# Altium PCB PCB1.PcbDoc
Units mm, origin at the board's own origin, x right, y up, seen from the top; angles counter-clockwise.
Board outline 90 x 50 mm, 2 copper layers (Top Layer, Bottom Layer); 14 components, 36 nets, 99 pads, 3 vias.
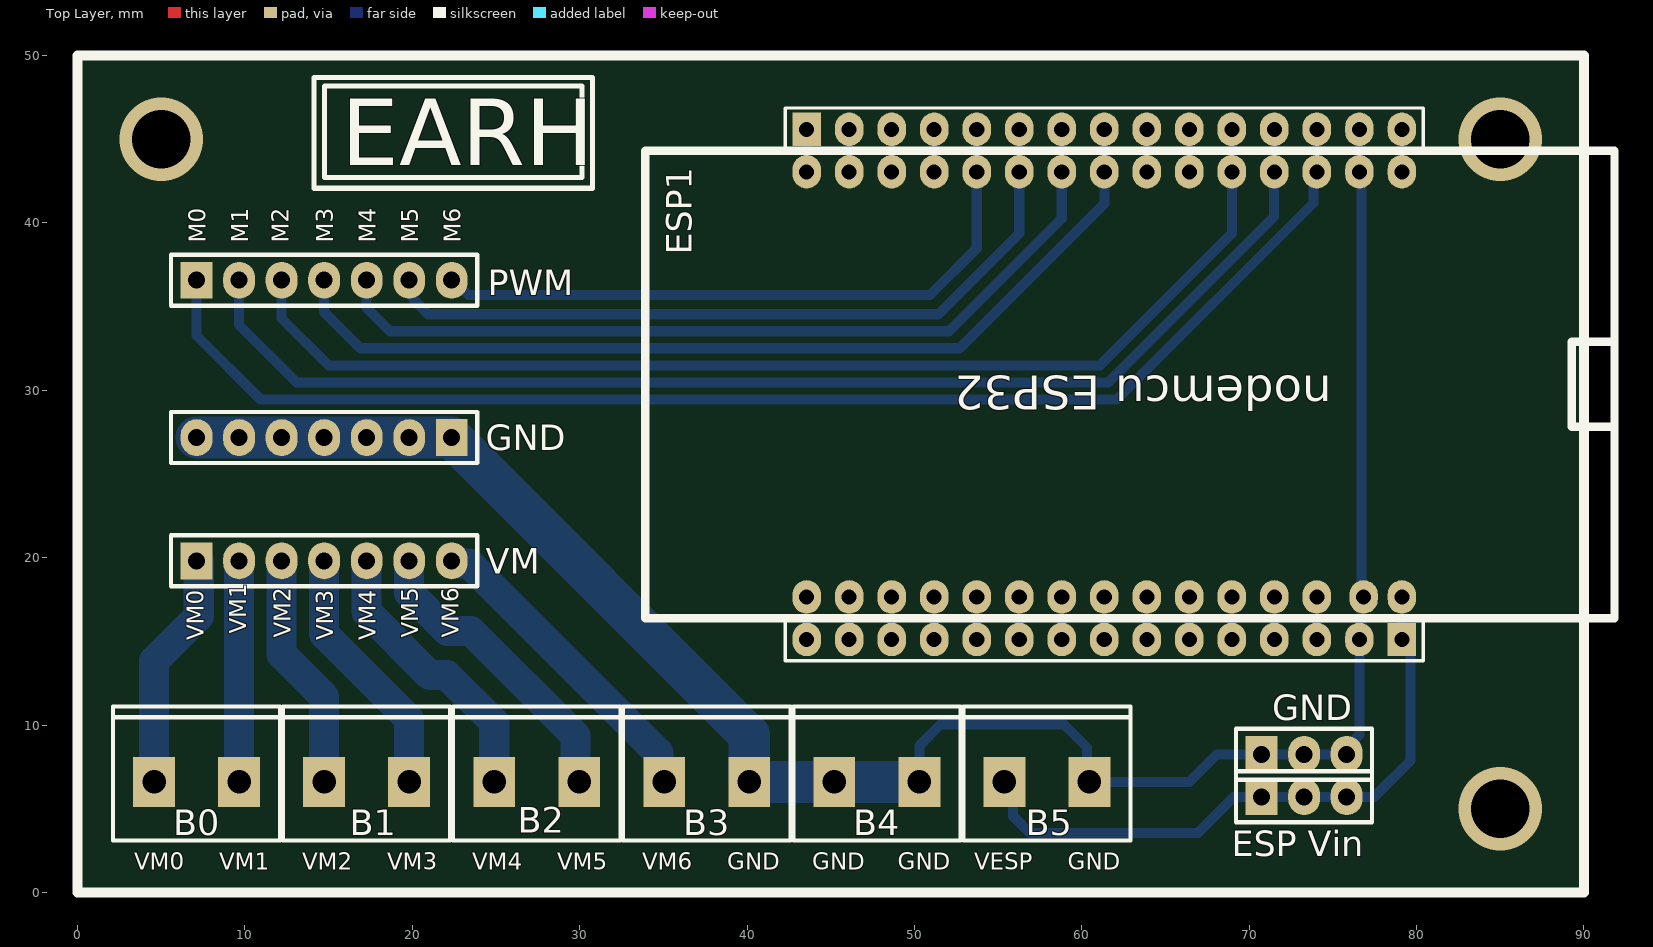
[diagram p0: Top Layer view]
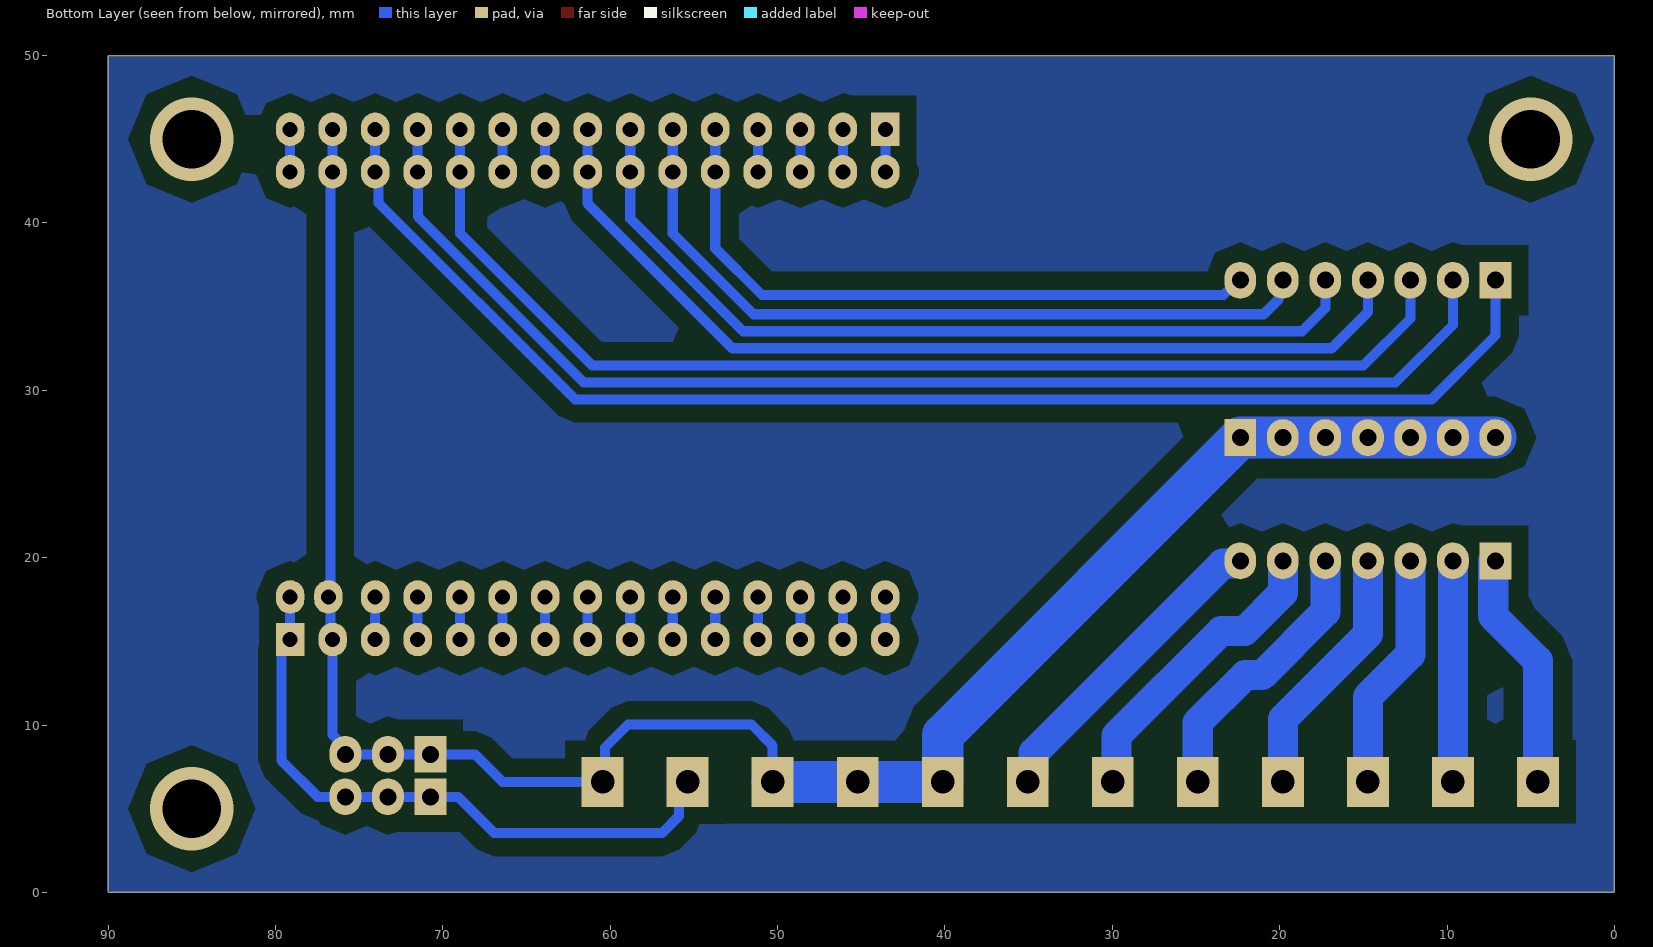
[diagram p1: Bottom Layer view, seen from below]

## Layer stack, top to bottom
Top Solder: solder mask 0.0102, Solder Resist, Dk 3.5
Top Layer: signal copper 0.0356
Dielectric 1: dielectric 0.32, FR-4, Dk 4.8
Bottom Layer: signal copper 0.0356
Bottom Solder: solder mask 0.0102, Solder Resist, Dk 3.5

## Board outline
0,0 90,0 90,50 0,50
cut-out: 0,121.158

## Design rules (kind name [scope] priority, off if disabled: settings)
Clearance [All] p1: gap=0 ignorepadtopadclearanceinfootprint=FALSE
ComponentClearance [All] p1: gap=0 collisioncheckmode=3 verticalgap=0 showdistances=FALSE
PolygonConnect [All] p1: connectstyle=Relief reliefconductorwidth=0.254 reliefentries=4 polygonreliefangle="90 Angle" airgapwidth=0.254
RoutingVias [All] p1: holewidth=0.711 width=1.27 viastyle="Through Hole" minholewidth=0.711 minwidth=1.27 maxholewidth=0.711 maxwidth=1.27
SolderMaskExpansion [All] p1: expansion=0.25 istentingtop=FALSE
Width [All] p1: maxlimit=4 minlimit=0.254 preferedwidth=1 toplayer_maxwidth=2 minimp=50.000000 maximp=50.000000 favimp=50.000000
29 further rules are at their usual default settings.

## Classes and differential pairs
component class Esquematico: B0 B1 B2 B3 B4 B5 ESP1 PWM VM

## Components (designator, comment, footprint, x,y, rotation, side; value= is the part's Value field where it differs from the comment)
B0 "bornera" "bornera chica" 12.112,11.104 r180 top
B1 "bornera" "bornera chica" 22.272,11.104 r180 top
B2 "bornera" "bornera chica" 32.432,11.104 r180 top
B3 "bornera" "bornera chica" 42.592,11.104 r180 top
B4 "bornera" "bornera chica" 52.752,11.104 r180 top
B5 "bornera" "bornera chica" 62.912,11.104 r180 top
ESP1 "ESP32" ESP32 79.121,17.653 r90 top
"ESP Vin" "Header 3" "Header 3" 70.739,5.715 r0 top (schematic designator P3)
GND "Header 7" "Header 7" 22.352,27.178 r180 top
GND "Header 3" "Header 3" 70.739,8.255 r0 top (schematic designator P2)
P0 "Header 15" HDR1X15 43.561,45.593 r0 top
P1 "Header 15" HDR1X15 79.121,15.113 r180 top
PWM "Header 7" "Header 7" 7.112,36.576 r0 top
VM "Header 7" "Header 7" 7.112,19.812 r0 top

## Footprints (in the part's own frame and the unit in brackets; to place one, negate y for a bottom-side part, rotate by r counter-clockwise, add the part's x,y. Pads: shape width x height; smd on the part's side, far side on the other; paste and mask are expansions set on the pad)
"bornera chica" [mm]
  rect 2.5x3 hole 1.4: 1(2.46,4.5) 2(7.54,4.5)
  silkscreen extent 0,0 10,8
ESP32 [mm]
  oval 2x1.7 hole 0.9: 0(0,0) 1(0,2.286) 2(0,5.08) 3(0,7.62) 4(0,10.16) 5(0,12.7) 6(0,15.24) 7(0,17.78) 8(0,20.32) 9(0,22.86) 10(0,25.4) 11(0,27.94) 12(0,30.48) 13(0,33.02) 14(0,35.56) 15(25.4,35.56) 16(25.4,33.02) 17(25.4,30.48) 18(25.4,27.94) 19(25.4,25.4) 20(25.4,22.86) 21(25.4,20.32) 22(25.4,17.78) 23(25.4,15.24) 24(25.4,12.7) 25(25.4,10.16) 26(25.4,7.62) 27(25.4,5.08) 28(25.4,2.54) 29(25.4,0)
  silkscreen extent -1.27,-12.7 26.67,45.21
HDR1X15 [mm] "Connector; Header; 15 Position"
  rect 1.7x2 hole 0.9: 1(0,0)
  oval 1.7x2 hole 0.9: 2(2.54,0) 3(5.08,0) 4(7.62,0) 5(10.16,0) 6(12.7,0) 7(15.24,0) 8(17.78,0) 9(20.32,0) 10(22.86,0) 11(25.4,0) 12(27.94,0) 13(30.48,0) 14(33.02,0) 15(35.56,0)
  silkscreen extent -1.27,-1.27 36.83,1.27
"Header 3" [mm] "Connector; Header; 3 Position; Solder Pad 35mil"
  rect 1.9x2.2 hole 1.016: 1(0,0)
  oval 1.9x2.2 hole 1.016: 2(2.54,0) 3(5.08,0)
  silkscreen extent -1.52,-1.52 6.6,1.52, body extent -1.27,-1.27 6.35,1.27, height 2.11
"Header 7" [mm] "Connector; Header; 7 Position; Solder Pad 35mil"
  rect 1.9x2.2 hole 1.016: 1(0,0)
  oval 1.9x2.2 hole 1.016: 2(2.54,0) 3(5.08,0) 4(7.62,0) 5(10.16,0) 6(12.7,0) 7(15.24,0)
  silkscreen extent -1.52,-1.52 16.76,1.52, body extent -1.27,-1.27 16.51,1.27, height 8.38

## Part data
"ESP Vin" GND: "Header, 3-Pin", LatestRevisionDate=17-Jul-2002, LatestRevisionNote="Re-released for DXP Platform.", Publisher="Altium Limited"
GND PWM VM: "Header, 7-Pin", LatestRevisionDate=17-Jul-2002, LatestRevisionNote="Re-released for DXP Platform.", Publisher="Altium Limited"
P0 P1: "Header, 15-Pin", LatestRevisionDate=17-Jul-2002, LatestRevisionNote="Re-released for DXP Platform.", Publisher="Altium Limited"

## Via types
v1: diameter 5, hole 3.5, Top Layer to Bottom Layer, 3 vias

## Nets (pads, with @x,y where several pads share a name; then routed paths per layer and width w, separated by ;. In a path a pad name is that pad's centre, name@x,y a point inside that pad or via, vN(x,y) a via of type N, cw(c..) or ccw(c..) an arc to the next point about the centre after c; other vN are vias at no path point)
ESP_Vin: "ESP Vin.1" "ESP Vin.2" "ESP Vin.3" B5.2 ESP1.0 P1.1 | length 38.2
  Bottom Layer w0.6: B5.2 55.897,6.079 55.897,4.555 56.896,3.556 66.929,3.556 69.088,5.715 70.739,5.715 73.279,5.715 75.819,5.715 77.47,5.715 79.629,7.874 79.629,14.605 P1.1 ESP1.0
GND: B3.1 B4.1 B4.2 B5.1 ESP1.1 ESP1.28 GND.1 GND.2 GND.3 GND.4 GND.5 GND.6 GND.7 P0.14 P1.2 | length 122.6
  Bottom Layer w0.6: B4.1 50.292,8.763 51.562,10.033 58.928,10.033 60.308,8.653 60.308,6.748 B5.1 66.421,6.604 68.072,8.255 70.739,8.255 73.279,8.255 75.819,8.255 75.819,8.644 76.581,9.406 P1.2 76.708,15.24 76.708,17.526 ESP1.1 76.708,17.78 76.708,42.926 ESP1.28 P0.14
  Bottom Layer w2.5: GND.7 GND.6 GND.5 GND.4 17.272,27.178 19.812,27.178 22.352,27.178 40.132,9.398 B3.1 B4.2 B4.1
NetESP1_2: ESP1.2 P1.3 | length 2.5
  Bottom Layer w0.6: P1.3 ESP1.2
NetESP1_3: ESP1.3 P1.4 | length 2.5
  Bottom Layer w0.6: P1.4 ESP1.3
NetESP1_4: ESP1.4 P1.5 | length 2.5
  Bottom Layer w0.6: P1.5 ESP1.4
NetESP1_5: ESP1.5 P1.6 | length 2.5
  Bottom Layer w0.6: P1.6 ESP1.5
NetESP1_6: ESP1.6 P1.7 | length 2.5
  Bottom Layer w0.6: P1.7 ESP1.6
NetESP1_7: ESP1.7 P1.8 | length 2.5
  Bottom Layer w0.6: P1.8 ESP1.7
NetESP1_8: ESP1.8 P1.9 | length 2.5
  Bottom Layer w0.6: P1.9 ESP1.8
NetESP1_9: ESP1.9 P1.10 | length 2.5
  Bottom Layer w0.6: P1.10 ESP1.9
NetESP1_10: ESP1.10 P1.11 | length 2.5
  Bottom Layer w0.6: P1.11 ESP1.10
NetESP1_11: ESP1.11 P1.12 | length 2.5
  Bottom Layer w0.6: P1.12 ESP1.11
NetESP1_12: ESP1.12 P1.13 | length 2.5
  Bottom Layer w0.6: P1.13 ESP1.12
NetESP1_13: ESP1.13 P1.14 | length 2.5
  Bottom Layer w0.6: P1.14 ESP1.13
NetESP1_14: ESP1.14 P1.15 | length 2.5
  Bottom Layer w0.6: P1.15 ESP1.14
NetESP1_15: ESP1.15 P0.1 | length 2.5
  Bottom Layer w0.6: ESP1.15 P0.1
NetESP1_16: ESP1.16 P0.2 | length 2.5
  Bottom Layer w0.6: ESP1.16 P0.2
NetESP1_17: ESP1.17 P0.3 | length 2.5
  Bottom Layer w0.6: ESP1.17 P0.3
NetESP1_18: ESP1.18 P0.4 | length 2.5
  Bottom Layer w0.6: ESP1.18 P0.4
NetESP1_23: ESP1.23 P0.9 | length 2.5
  Bottom Layer w0.6: ESP1.23 P0.9
NetESP1_24: ESP1.24 P0.10 | length 2.5
  Bottom Layer w0.6: ESP1.24 P0.10
NetESP1_29: ESP1.29 P0.15 | length 2.5
  Bottom Layer w0.6: ESP1.29 P0.15
PWM_M0: ESP1.27 P0.13 PWM.1 | length 80.9
  Bottom Layer w0.6: PWM.1 7.112,33.274 10.922,29.464 62.103,29.464 73.837,41.198 73.837,42.849 ESP1.27 P0.13
PWM_M1: ESP1.26 P0.12 PWM.2 | length 75.2
  Bottom Layer w0.6: PWM.2 9.652,33.909 13.081,30.48 61.595,30.48 71.487,40.372 71.487,43.039 ESP1.26 P0.12
PWM_M2: ESP1.25 P0.11 PWM.3 | length 69.7
  Bottom Layer w0.6: PWM.3 12.192,34.29 14.986,31.496 61.087,31.496 68.961,39.37 ESP1.25 P0.11
PWM_M3: ESP1.22 P0.8 PWM.4 | length 57.4
  Bottom Layer w0.6: PWM.4 14.732,34.671 16.891,32.512 52.705,32.512 61.341,41.148 P0.8
PWM_M4: ESP1.21 P0.7 PWM.5 | length 51.9
  Bottom Layer w0.6: PWM.5 17.272,34.925 18.669,33.528 52.07,33.528 58.801,40.259 ESP1.21 P0.7
PWM_M5: ESP1.20 P0.6 PWM.6 | length 46
  Bottom Layer w0.6: PWM.6 20.061,36.327 20.061,35.438 20.955,34.544 51.435,34.544 56.261,39.37 ESP1.20 P0.6
PWM_M6: ESP1.19 P0.5 PWM.7 | length 40
  Bottom Layer w0.6: PWM.7 22.464,36.576 23.353,35.687 50.927,35.687 53.721,38.481 ESP1.19 P0.5
VM0: B0.2 VM.1 | length 14.3
  Bottom Layer w1.8: B0.2 4.572,13.843 7.239,16.51 VM.1@7.239,19.812
VM1: B0.1 VM.2 | length 13.2
  Bottom Layer w1.8: B0.1 VM.2
VM2: B1.2 VM.3 | length 14.3
  Bottom Layer w1.8: VM.3 12.192,14.224 14.732,11.684 B1.2
VM3: B1.1 VM.4 | length 15.3
  Bottom Layer w1.8: VM.4 14.732,15.438 19.812,10.358 B1.1
VM4: B2.2 VM.5 | length 17
  Bottom Layer w1.8: VM.5 17.272,16.764 21.055,12.981 22.071,12.981 24.892,10.16 B2.2
VM5: B2.1 VM.6 | length 18.2
  Bottom Layer w1.8: VM.6 19.812,17.907 22.098,15.621 23.495,15.621 29.758,9.358 29.758,7.204 29.972,6.99 B2.1
VM6: B3.2 VM.7 | length 18.9
  Bottom Layer w1.8: VM.7@22.398,19.643 23.41,19.643 34.702,8.351 34.702,6.954 B3.2
copper on no net:
  other v1: 85,5 5,45 85,45

## Polygon pours and split planes (outlines as drawn)
no net on Bottom Layer "NONET_L02_P002" (solid, pour order 2): 0,49.911 90.043,49.911 90.043,0.254 89.789,0 0,0

## Silkscreen, mask and mechanical layers (free items; w line width, h text height)
Top Overlay:
  lines w0.3: 14.132,42.072 14.132,48.676 30.769,48.676 30.769,42.072 14.132,42.072 ; 14.767,42.707 14.767,48.168 30.134,48.168 30.134,42.707 14.767,42.707
  lines w0.6: 0,0 90,0 90,50 0,50 0,0
  text "EARH" at 15.748,43.434 h4
  text "M0" at 7.654,38.828 h1 r90
  text "M1" at 10.194,38.828 h1 r90
  text "M2" at 12.607,38.828 h1 r90
  text "M3" at 15.274,38.828 h1 r90
  text "M4" at 17.814,38.828 h1 r90
  text "M5" at 20.354,38.828 h1 r90
  text "M6" at 22.894,38.828 h1 r90
  text "VM1" at 10.067,15.46 h1 r90
  text "VM2" at 12.734,15.206 h1 r90
  text "VM5" at 20.354,15.206 h1 r90
  text "VM6" at 22.767,15.206 h1 r90
  text "VM0" at 7.527,15.079 h1 r90
  text "VM3" at 15.274,15.079 h1 r90
  text "VM4" at 17.814,15.079 h1 r90
  text "VM0" at 3.395,1.363 h1
  text "VM1" at 8.475,1.363 h1
  text "VM2" at 13.428,1.363 h1
  text "VM3" at 18.508,1.363 h1
  text "VM4" at 23.588,1.363 h1
  text "VM5" at 28.668,1.363 h1
  text "VM6" at 33.748,1.363 h1
  text "GND" at 38.828,1.363 h1
  text "GND" at 43.908,1.363 h1
  text "GND" at 48.988,1.363 h1
  text "VESP" at 53.56,1.363 h1
  text "GND" at 59.148,1.363 h1

## Text inside footprints (layer, text, board x,y; h text height)
ESP1: Top Overlay "nodemcu ESP32" at 74.93,30.861 h2.03 r180